# Altium PCB DCMT_DRIVER_40V10A.PcbDoc
Units mm, origin at the board's own origin, x right, y up, seen from the top; angles counter-clockwise.
Board outline 60 x 40 mm, 2 copper layers (Top Layer, Bottom Layer); 68 components, 48 nets, 224 pads, 178 vias.
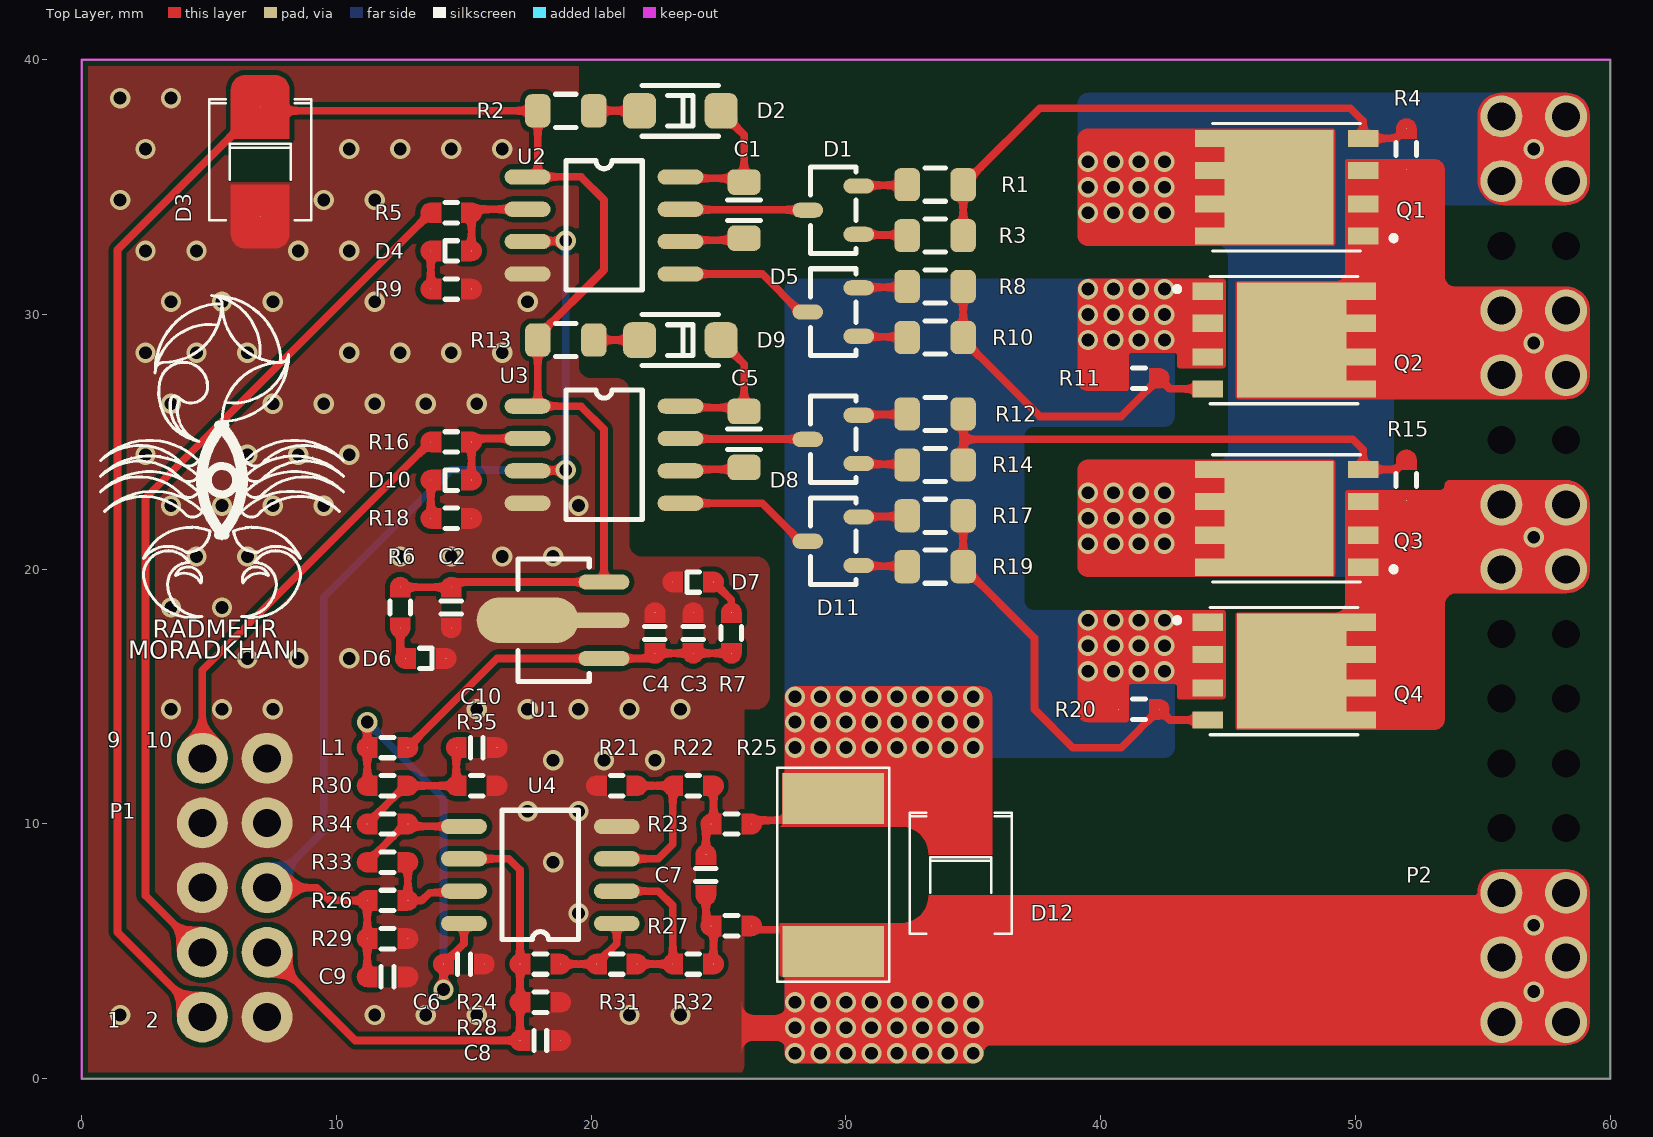
[diagram p0: Top Layer view]
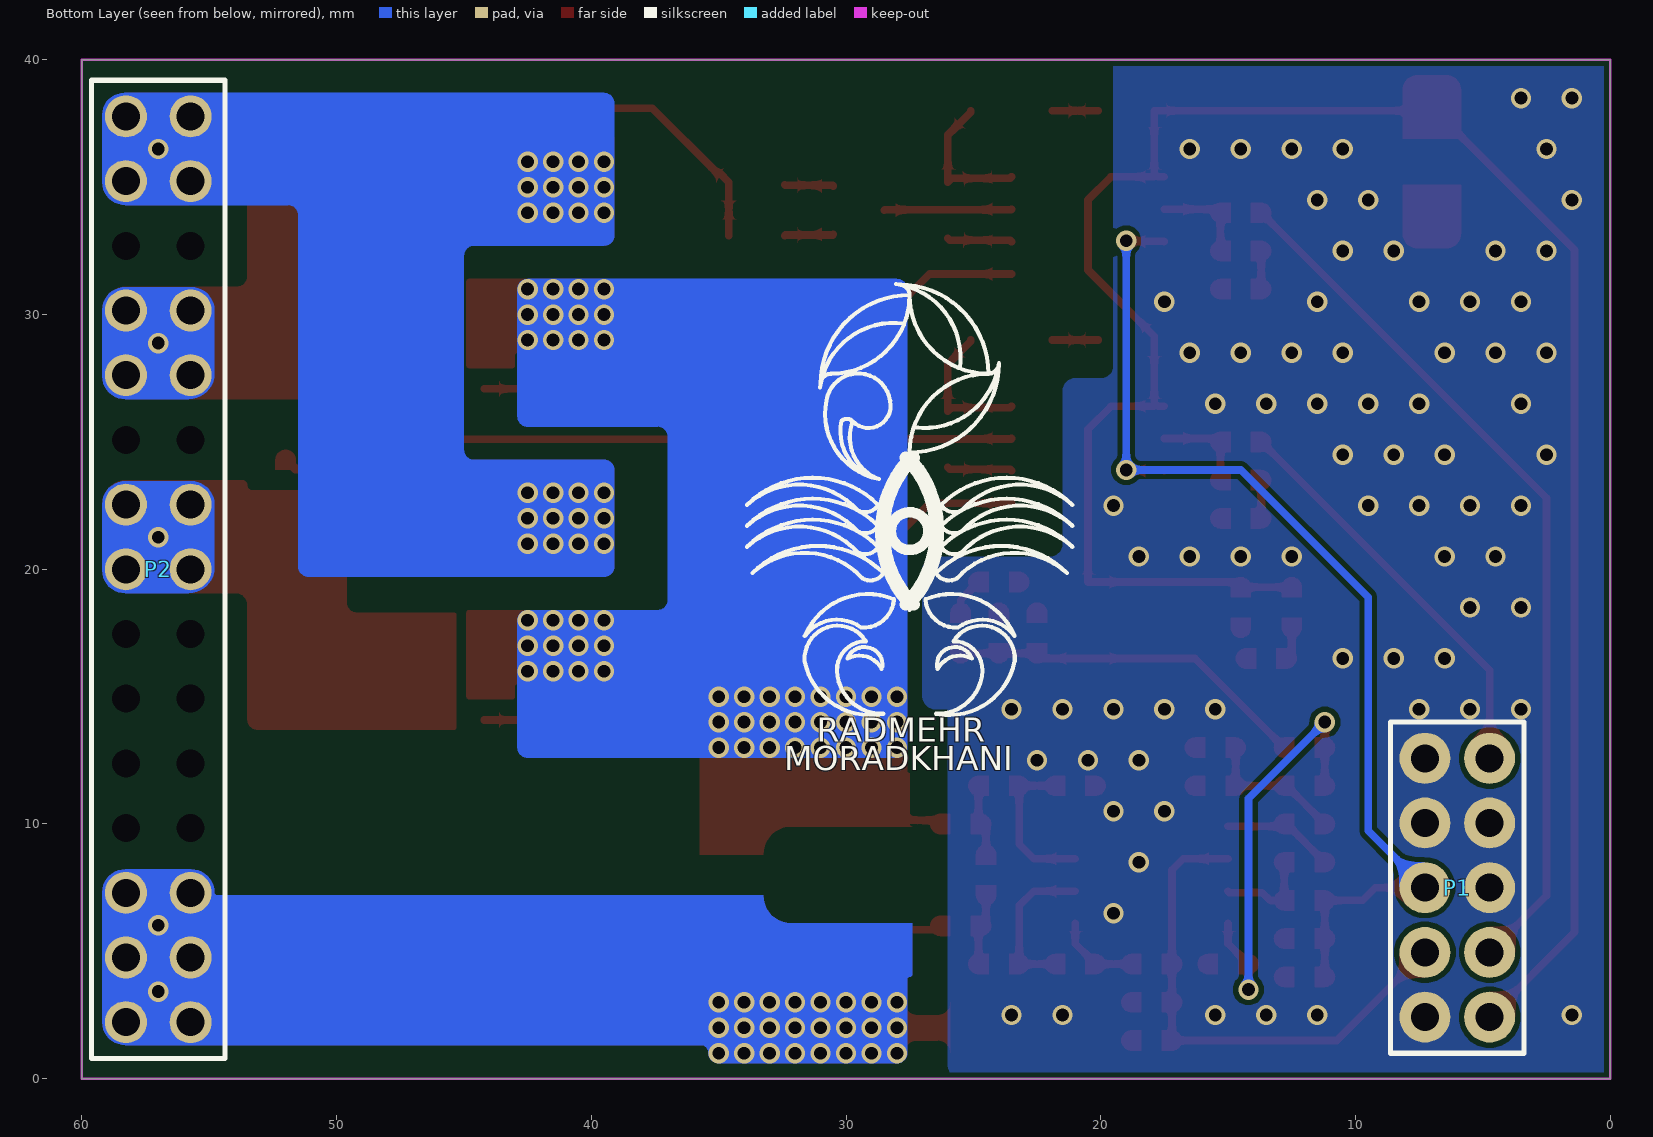
[diagram p1: Bottom Layer view, seen from below]
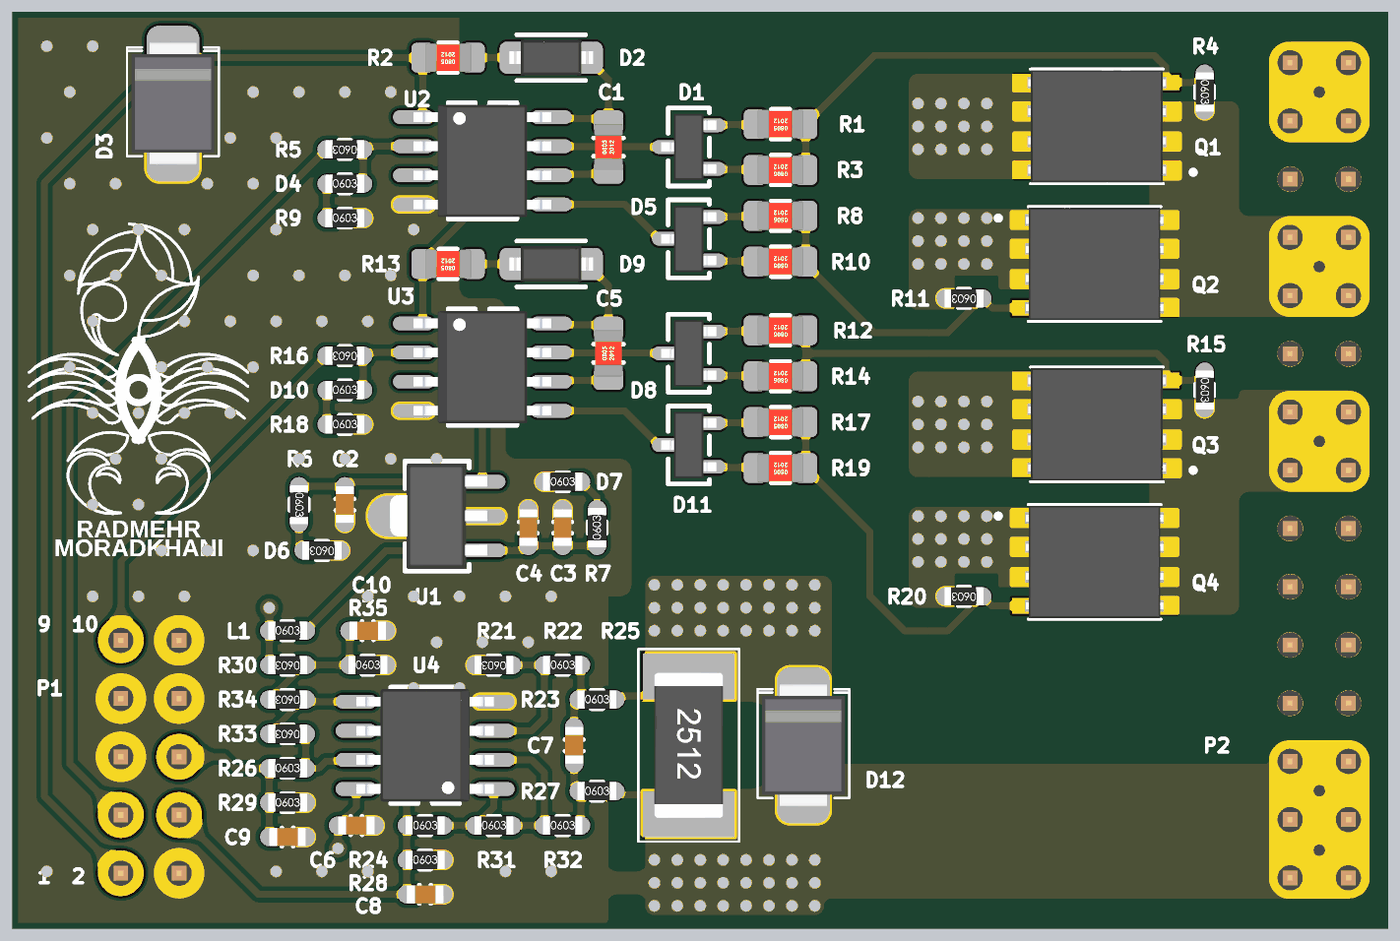
[diagram p2: 3D render of the assembled board from above, using the file's embedded part models]

## Layer stack, top to bottom
Top Solder: solder mask 0.0102, Solder Resist, Dk 3.5
Top Layer: signal copper 0.0356
Dielectric 1: dielectric 0.32, FR-4, Dk 4.8
Bottom Layer: signal copper 0.0356
Bottom Solder: solder mask 0.0102, Solder Resist, Dk 3.5

## Board outline
0,0 0,40 60,40 60,0

## Design rules (kind name [scope] priority, off if disabled: settings)
Clearance [All] p1: gap=0.2 ignorepadtopadclearanceinfootprint=FALSE
DiffPairsRouting [All] p1: maxlimit=0.3 minlimit=0.3 mostfreqgap=0.3 toplayer_minwidth=0.3 toplayer_maxwidth=0.3 toplayer_prefwidth=0.3 bottomlayer_minwidth=0.3 bottomlayer_maxwidth=0.3 bottomlayer_prefwidth=0.3 maxuncoupledlength=12.7
PlaneConnect [All] p1: planeconnectstyle=Relief reliefexpansion=0.5 reliefentries=4 reliefconductorwidth=0.3 reliefairgap=0.3
PolygonConnect [All] p1: connectstyle=Direct reliefconductorwidth=0.3 reliefentries=4 polygonreliefangle="90 Angle" airgapwidth=0.2
RoutingVias [All] p1: holewidth=0.5 width=0.8 viastyle="Through Hole" minholewidth=0.5 minwidth=0.8 maxholewidth=0.5 maxwidth=0.8
SolderMaskExpansion [All] p1: expansion=0.102 istentingtop=FALSE
Width [All] p1: maxlimit=1.2 minlimit=0.3 preferedwidth=0.6 minimp=50.000000 maximp=50.000000 favimp=50.000000
28 further rules are at their usual default settings.

## Components (designator, comment, footprint, x,y, rotation, side; value= is the part's Value field where it differs from the comment)
C1 "10u" "C 0805" 26,34.1 r270 top locked
C2 "10U" "C 0603" 14.5,18.5 r90 top locked
C3 "10U" "C 0603" 24,17.5 r270 top locked
C4 "1U" "C 0603" 22.5,17.5 r270 top locked
C5 "10u" "C 0805" 26,25.1 r270 top locked
C6 "100n" "C 0603" 15,4.5 r180 top locked
C7 "100n" "C 0603" 24.5,8 r90 top locked
C8 "100P" "C 0603" 18,1.5 r180 top locked
C9 "100P" "C 0603" 12,4 r180 top locked
C10 "100n" "C 0603" 15.5,13 r0 top locked
D1 "BAT54S" SOT-23_3_D 29.5,34.1 r180 top
D2 "US1M" "D SOD-123" 23.5,38 r0 top locked
D3 "+18V0" DIOD_SMB 7,36 r90 top
D4 "LED_SMD" "D 0603" 14.5,32.5 r180 top
D5 "BAT54S" SOT-23_3_D 29.5,30.1 r180 top
D6 "LED_SMD" "D 0603" 13.5,16.5 r0 top locked
D7 "LED_SMD" "D 0603" 24,19.5 r180 top locked
D8 "BAT54S" SOT-23_3_D 29.5,25.1 r180 top
D9 "1N4148" "D SOD-123" 23.5,29 r0 top locked
D10 "LED_SMD" "D 0603" 14.5,23.5 r180 top locked
D11 "BAT54S" SOT-23_3_D 29.5,21.1 r180 top
D12 "+5v0" DIOD_SMB 34.5,8 r90 top locked
L1 "FB" "L 0603" 12,13 r180 top locked
P1 "61301021121" 61301021121 6,7.5 r90 bottom
P2 "61303021121" 61303021121 57,20 r90 bottom
Q1 "CSD19533Q5A" Q5A 47,35 r180 top
Q2 "CSD19533Q5A" Q5A 47.5,29 r0 top
Q3 "CSD19533Q5A" Q5A 47,22 r180 top
Q4 "CSD19533Q5A" Q5A 47.5,16 r0 top
R1 "56R" "R 0805" 33.5,35.1 r0 top
R2 "10R" "R 0805" 19,38 r0 top locked
R3 "100R" "R 0805" 33.5,33.1 r0 top
R4 "10K" "R 0603" 52,36.5 r90 top
R5 "100R" "R 0603" 14.5,34 r0 top
R6 "4.7K" "R 0603" 12.5,18.5 r90 top locked
R7 "4.7K" "R 0603" 25.5,17.5 r270 top locked
R8 "56R" "R 0805" 33.5,31.1 r0 top
R9 "10K" "R 0603" 14.5,31 r180 top
R10 "100R" "R 0805" 33.5,29.1 r0 top
R11 "10K" "R 0603" 41.5,27.5 r0 top
R12 "56R" "R 0805" 33.5,26.1 r0 top
R13 "10R" "R 0805" 19,29 r0 top locked
R14 "100R" "R 0805" 33.5,24.1 r0 top
R15 "10K" "R 0603" 52,23.5 r90 top
R16 "100R" "R 0603" 14.5,25 r0 top locked
R17 "56R" "R 0805" 33.5,22.1 r0 top
R18 "10K" "R 0603" 14.5,22 r180 top locked
R19 "100R" "R 0805" 33.5,20.1 r0 top
R20 "10K" "R 0603" 41.5,14.5 r0 top
R21 "10K" "R 0603" 21,11.5 r0 top locked
R22 "1K" "R 0603" 24,11.5 r180 top locked
R23 "100R" "R 0603" 25.5,10 r180 top locked
R24 "100R" "R 0603" 18,4.5 r180 top locked
R25 "0R02" "R 2512" 29.5,8 r90 top locked
R26 "100R" "R 0603" 12,7 r180 top locked
R27 "100R" "R 0603" 25.5,6 r180 top locked
R28 "10K" "R 0603" 18,3 r180 top locked
R29 "10K" "R 0603" 12,5.5 r180 top locked
R30 "10k" "R 0603" 12,11.5 r0 top locked
R31 "10K" "R 0603" 21,4.5 r180 top locked
R32 "1K" "R 0603" 24,4.5 r180 top locked
R33 "9K" "R 0603" 12,8.5 r0 top locked
R34 "1K" "R 0603" 12,10 r0 top locked
R35 "10K" "R 0603" 15.5,11.5 r180 top locked
U1 "AP7370-XXY-13" SOT89-U 18.5,18 r90 top locked
U2 "IR2104" SOIC-8 20.5,33.5 r0 top locked
U3 "IR2104" SOIC-8 20.5,24.5 r0 top locked
U4 "TLV9062" SOIC-8 18,8 r180 top locked

## Footprints (in the part's own frame and the unit in brackets; to place one, negate y for a bottom-side part, rotate by r counter-clockwise, add the part's x,y. Pads: shape width x height; smd on the part's side, far side on the other; paste and mask are expansions set on the pad)
61301021121 [mm] "Pin Header, pitch 2.54 mm, THT, Vertical, dual row, 10p"
  round 2 hole 1.1: 1(-5.08,-1.27) 2(-5.08,1.27) 3(-2.54,-1.27) 4(-2.54,1.27) 5(0,-1.27) 6(0,1.27) 7(2.54,-1.27) 8(2.54,1.27) 9(5.08,-1.27) 10(5.08,1.27)
  silkscreen extent -6.5,-2.62 6.5,2.62, body extent -6.35,-2.54 6.35,2.54, height 8.59
61303021121 [mm] "Pin Header, pitch 2.54 mm, THT, Vertical, dual row, 30p"
  round 1.65 hole 1.1: 1(-17.78,-1.27) 2(-17.78,1.27) 3(-15.24,-1.27) 4(-15.24,1.27) 5(-12.7,-1.27) 6(-12.7,1.27) 15(0,-1.27) 16(0,1.27) 17(2.54,-1.27) 18(2.54,1.27) 21(7.62,-1.27) 22(7.62,1.27) 23(10.16,-1.27) 24(10.16,1.27) 27(15.24,-1.27) 28(15.24,1.27) 29(17.78,-1.27) 30(17.78,1.27)
  round 0 hole 1.1: 7(-10.16,-1.27) 8(-10.16,1.27) 9(-7.62,-1.27) 10(-7.62,1.27) 11(-5.08,-1.27) 12(-5.08,1.27) 13(-2.54,-1.27) 14(-2.54,1.27) 19(5.08,-1.27) 20(5.08,1.27) 25(12.7,-1.27) 26(12.7,1.27)
  silkscreen extent -19.2,-2.62 19.2,2.62, body extent -19.05,-2.54 19.05,2.54, height 8.59
"C 0603" [mil] "C?"
  round 1 smd mask+1.97: 1(-31.5,0) 2(31.5,0)
  Top Layer pour cut-out: -15.75,15.75 15.75,15.75 15.75,-15.75 -15.75,-15.75
  Top Layer region: -47.24,0 -46.04,6.03 -42.63,11.14 -37.52,14.55 -31.5,15.75 -31.5,15.75 -15.75,15.75 -15.75,-15.75 -31.5,-15.75 -37.52,-14.55 -42.63,-11.14 -46.04,-6.03 -47.24,0
  Top Layer region: 47.24,0 46.05,-6.03 42.63,-11.14 37.52,-14.55 31.5,-15.75 31.5,-15.75 15.75,-15.75 15.75,15.75 31.5,15.75 37.52,14.55 42.63,11.14 46.05,6.03 47.24,0
  silkscreen extent -10,-16 10,16, body extent -32,-16 31,16, height 35
"C 0805" [mm] "C?"
  rrect50% 1x1.3 smd: 1(-1.1,0) 2(1.1,0)
  Top Layer pour cut-out: -0.5,0.65 0.5,0.65 0.5,-0.65 -0.5,-0.65
  silkscreen extent -0.4,-0.65 0.4,0.65, body extent -1,-0.63 1,0.62, height 0.9
"D 0603" [mil] "D?"
  round 1 smd mask+1.97: 1(-31.5,0) 2(31.5,0)
  Top Layer pour cut-out: -15.75,15.75 15.75,15.75 15.75,-15.75 -15.75,-15.75
  Top Layer region: -47.24,0 -46.04,6.03 -42.63,11.14 -37.52,14.55 -31.5,15.75 -31.5,15.75 -15.75,15.75 -15.75,-15.75 -31.5,-15.75 -37.52,-14.55 -42.63,-11.14 -46.04,-6.03 -47.24,0
  Top Layer region: 47.24,0 46.05,-6.03 42.63,-11.14 37.52,-14.55 31.5,-15.75 31.5,-15.75 15.75,-15.75 15.75,15.75 31.5,15.75 37.52,14.55 42.63,11.14 46.05,6.03 47.24,0
  silkscreen extent -10,-16 10,16, body extent -33,-16 33,16, height 22
"D SOD-123" [mm] "D?"
  rrect50% 1.3x1.4 smd mask+0.1: 1(-1.6,0) 2(1.6,0)
  Top Layer pour cut-out: -1,0.9 1,0.9 1,-0.9 -1,-0.9
  silkscreen extent -1.5,-1 1.5,1, body extent -1.83,-0.77 1.83,0.77, height 1.54
DIOD_SMB [mil] "D?"
  round 1 smd: 1(-84.65,0) 2(84.65,0)
  Top Layer pour cut-out: -31.5,49.21 31.5,49.21 31.5,-49.21 -31.5,-49.21
  Top Layer region: 111.22,-45.28 35.43,-45.28 35.43,45.28 111.22,45.28 119.88,43.55 127.23,38.65 132.14,31.3 133.86,22.64 133.86,22.64 133.86,-22.64 132.14,-31.3 127.23,-38.65 119.88,-43.55 111.22,-45.28
  Top Layer region: -111.22,-45.28 -119.88,-43.55 -127.23,-38.65 -132.14,-31.3 -133.86,-22.64 -133.86,-22.64 -133.86,22.64 -132.14,31.3 -127.23,38.65 -119.88,43.55 -111.22,45.28 -111.22,45.28 -35.43,45.28 -35.43,-45.28
  silkscreen extent -91,-79 96,79, body extent -106,-71 106,71, height 91
"L 0603" [mil] "L?"
  round 1 smd mask+1.97: 1(-31.5,0) 2(31.5,0)
  Top Layer pour cut-out: -15.75,15.75 15.75,15.75 15.75,-15.75 -15.75,-15.75
  Top Layer region: 47.24,0 46.05,-6.03 42.63,-11.14 37.52,-14.55 31.5,-15.75 31.5,-15.75 15.75,-15.75 15.75,15.75 31.5,15.75 37.52,14.55 42.63,11.14 46.05,6.03 47.24,0
  Top Layer region: -47.24,0 -46.04,6.03 -42.63,11.14 -37.52,14.55 -31.5,15.75 -31.5,15.75 -15.75,15.75 -15.75,-15.75 -31.5,-15.75 -37.52,-14.55 -42.63,-11.14 -46.04,-6.03 -47.24,0
  silkscreen extent -10,-16 10,16, body extent -33,-16 33,16, height 22
Q5A [mm] "Q?"
  rect 1.2x0.675 smd paste-1: 1(-3.301,-1.918) 2(2.699,1.918) 2(2.699,0.66) 2(2.699,-0.66) 2(2.699,-1.917) 3(-3.301,-0.66) 3(-3.301,0.66) 3(-3.301,1.917)
  rect 4.295x4.51 smd paste-3: 2(0,0)
  silkscreen extent -4.55,-2.5 2.6,2.5, body extent -3.3,-2.45 2.7,2.45, height 1.11
"R 0603" [mil] "R?"
  round 1 smd mask+1.97: 1(-31.5,0) 2(31.5,0)
  Top Layer pour cut-out: -15.75,15.75 15.75,15.75 15.75,-15.75 -15.75,-15.75
  Top Layer region: 47.24,0 46.05,-6.03 42.63,-11.14 37.52,-14.55 31.5,-15.75 31.5,-15.75 15.75,-15.75 15.75,15.75 31.5,15.75 37.52,14.55 42.63,11.14 46.05,6.03 47.24,0
  Top Layer region: -47.24,0 -46.04,6.03 -42.63,11.14 -37.52,14.55 -31.5,15.75 -31.5,15.75 -15.75,15.75 -15.75,-15.75 -31.5,-15.75 -37.52,-14.55 -42.63,-11.14 -46.04,-6.03 -47.24,0
  silkscreen extent -10,-16 10,16, body extent -33,-16 33,16, height 22
"R 0805" [mm] "R?"
  rrect50% 1x1.3 smd: 1(-1.1,0) 2(1.1,0)
  Top Layer pour cut-out: -0.5,0.65 0.5,0.65 0.5,-0.65 -0.5,-0.65
  silkscreen extent -0.4,-0.65 0.4,0.65, body extent -1,-0.63 1,0.62, height 0.9
"R 2512" [mm] "R?"
  rect 2x4 smd: 1(-3,0) 2(3,0)
  Top Layer pour cut-out: -1.9,2.1 1.9,2.1 1.9,-2.1 -1.9,-2.1
  silkscreen extent -4.2,-2.2 4.2,2.2, body extent -3.17,-1.5 3.17,1.5, height 1.6
SOIC-8 [mm] "U?"
  oval 1.8x0.6 smd: 1(-3,1.905) 2(-3,0.635) 3(-3,-0.635) 4(-3,-1.905) 5(3,-1.905) 6(3,-0.635) 7(3,0.635) 8(3,1.905)
  silkscreen extent -1.5,-2.54 1.5,2.54, body extent -3,-2.45 3,2.45, height 1.75
SOT89-U [mm] "U?"
  oval 0.6x2 smd: 1(-1.5,-2) 3(1.5,-2)
  oval 0.6x4 smd: 2(0,-1)
  oval 1.8x4 smd mask+0.1: 2(0,1)
  silkscreen extent -2.4,-1.42 2.4,1.38, body extent -2.3,-2.22 2.3,2.03, height 1.59
SOT-23_3_D [mm] "D?"
  oval 1.2x0.6 smd: 1(-1,0.95) 2(-1,-0.95) 3(1,0)
  silkscreen extent -0.9,-1.7 0.9,1.7, body extent -1.2,-1.45 1.2,1.45, height 1.16

## Part data
C1 C2 C3 C4 C5 C6 C7 C8 C9 C10: library part CAP_SMD, "CAP_SMD"
D2 D9: library part DIOD_SMD, "DIOD_SMD"
D3 D12: library part DIOD_SMD_TVS_UI, "TVS_UI"
L1: library part Inductor, "Inductor"
P1: "WR-PHD Pin Header, THT, pitch 2.54mm, Dual Row, Vertical, 10p", Contact Resistance=20mOhm, Manufacturer="Wurth Elektronik", Operating Temperature="-40 to +105degC", Rated Current=3A, Withstanding Voltage=500VAC, Working Voltage=250VAC, ComponentLink1Description=Manufacturer, ComponentLink1URL=http://www.we-online.de, ComponentLink2Description=Datasheet, ComponentLink2URL=https://www.we-online.com/catalog/datasheet/61301021121.pdf, Gender="Pin Header", Manufacturer Part Number=61301021121, Mounting Technology=THT, Orientation=Vertical, Packaging=Bag, Pin Number=10, Pitch=2.54mm, Row Number=Dual
P2: "WR-PHD Pin Header, THT, pitch 2.54mm, Dual Row, Vertical, 30p", Contact Resistance=20mOhm, Manufacturer="Wurth Elektronik", Operating Temperature="-40 to +105degC", Rated Current=3A, Withstanding Voltage=500VAC, Working Voltage=250VAC, ComponentLink1Description=Manufacturer, ComponentLink1URL=http://www.we-online.de, ComponentLink2Description=Datasheet, ComponentLink2URL=https://www.we-online.com/catalog/datasheet/61303021121.pdf, Gender="Pin Header", Manufacturer Part Number=61303021121, Mounting Technology=THT, Orientation=Vertical, Packaging=Bag, Pin Number=30, Pitch=2.54mm, Row Number=Dual
R1 R2 R3 R4 R5 R6 R7 R8 R9 R10 R11 R12 R13 R14 R15 R16 R17 R18 R19 R20 R21 R22 R23 R24 R25 R26 R27 R28 R29 R30 R31 R32 R33 R34 R35: library part RES_SMD, "RES_SMD"

## Via types
v1: diameter 0.8, hole 0.5, Top Layer to Bottom Layer, tented both sides, 178 vias

## Nets (pads, with @x,y where several pads share a name; then routed paths per layer and width w, separated by ;. In a path a pad name is that pad's centre, name@x,y a point inside that pad or via, vN(x,y) a via of type N, cw(c..) or ccw(c..) an arc to the next point about the centre after c; other vN are vias at no path point)
+3V3: C3.2 C4.2 L1.1 R7.2 U1.1 | length 14.2
  Top Layer w0.3: L1.1 16.3,16.5 U1.1 22.3,16.5 C4.2 C3.2 R7.2
+3V3A: C6.2 L1.2 R30.1 U4.8 | length 17.2
  Top Layer w0.3: R30.1 v1(11.2,14) ; v1(14.2,3.5) C6.2 15,5.3 U4.8
  Bottom Layer w0.3: v1(11.2,14) 14.2,11 v1(14.2,3.5)
+15V0: C2.2 D3.2 P1.1 R2.1 R6.2 R13.1 U1.3 U2.1 U3.1 | length 82.8
  Top Layer w0.3: P1.1 1.4,5.75 1.4,32.55 D3.2 7.15,38 R2.1 17.9,35.544 17.761,35.405 U2.1 ; R6.2 C2.2 14.7,19.5 U1.3 20.5,25.5 19.595,26.405 U3.1@17.9,26.405 ; U3.1 17.761,26.405 17.9,26.544 R13.1 17.9,29.15 20.5,31.75 20.5,34.5 19.595,35.405 U2.1@17.9,35.405
+40V0: P2.27 P2.28 P2.29 P2.30 Q1.2 Q3.2
  other v1: 39.5,21 40.5,21 41.5,21 42.5,21 39.5,22 40.5,22 41.5,22 42.5,22 39.5,23 40.5,23 41.5,23 42.5,23 39.5,34 40.5,34 41.5,34 42.5,34 39.5,35 40.5,35 41.5,35 42.5,35 39.5,36 40.5,36 41.5,36 42.5,36 57,36.5
GND: C2.1 C3.1 C4.1 C6.1 C8.1 C9.1 C10.2 D3.1 D6.2 D7.2 D12.1 P1.2 P1.5 P1.7 P1.8 P1.10 P2.1 P2.2 P2.3 P2.4 P2.5 P2.6 R9.1 R18.1 R21.1 R25.1 R27.1 R28.1 R29.1 R35.1 U1.2 U2.4 U3.4 U4.4 | length 3.6
  Top Layer w0.3: R27.1 26.45,5.85 28.65,5.85 R25.1
  other v1: 28,1 29,1 30,1 31,1 32,1 33,1 34,1 35,1 28,2 29,2 30,2 31,2 32,2 33,2 34,2 35,2 1.5,2.5 11.5,2.5 13.5,2.5 15.5,2.5 21.5,2.5 23.5,2.5 28,3 29,3 30,3 31,3 32,3 33,3 34,3 35,3 57,3.42 57,6.02 19.5,6.5 18.5,8.5 17.5,10.5 19.5,10.5 18.5,12.5 20.5,12.5 22.5,12.5 3.5,14.5 5.5,14.5 7.5,14.5 15.5,14.5 17.5,14.5 19.5,14.5 21.5,14.5 23.5,14.5 6.5,16.5 8.5,16.5 10.5,16.5 3.5,18.5 5.5,18.5 4.5,20.5 6.5,20.5 12.5,20.5 14.5,20.5 16.5,20.5 18.5,20.5 3.5,22.5 5.5,22.5 7.5,22.5 9.5,22.5 19.5,22.5 2.5,24.5 6.5,24.5 8.5,24.5 10.5,24.5 3.5,26.5 7.5,26.5 9.5,26.5 11.5,26.5 13.5,26.5 15.5,26.5 2.5,28.5 4.5,28.5 6.5,28.5 10.5,28.5 12.5,28.5 14.5,28.5 16.5,28.5 3.5,30.5 5.5,30.5 7.5,30.5 11.5,30.5 17.5,30.5 2.5,32.5 4.5,32.5 8.5,32.5 10.5,32.5 1.5,34.5 9.5,34.5 11.5,34.5 2.5,36.5 10.5,36.5 12.5,36.5 14.5,36.5 16.5,36.5 1.5,38.5 3.5,38.5
HB_OUT_A: P2.21 P2.22 P2.23 P2.24 Q1.3 Q2.2 R4.1
  other v1: 57,28.88
HB_OUT_B: P2.15 P2.16 P2.17 P2.18 Q3.3 Q4.2 R15.1
  other v1: 57,21.26
HB_S: D12.2 Q2.3 Q4.3 R11.1 R20.1 R23.1 R25.2 | length 3.6
  Top Layer w0.3: R23.1 26.45,10.15 28.65,10.15 R25.2
  other v1: 28,13 29,13 30,13 31,13 32,13 33,13 34,13 35,13 28,14 29,14 30,14 31,14 32,14 33,14 34,14 35,14 28,15 29,15 30,15 31,15 32,15 33,15 34,15 35,15 39.5,16 40.5,16 41.5,16 42.5,16 39.5,17 40.5,17 41.5,17 42.5,17 39.5,18 40.5,18 41.5,18 42.5,18 39.5,29 40.5,29 41.5,29 42.5,29 39.5,30 40.5,30 41.5,30 42.5,30 39.5,31 40.5,31 41.5,31 42.5,31
I\_\S\D\: C9.2 P1.6 R26.2 R29.2 U2.3 U3.3 | length 43.1
  Top Layer w0.3: P1.6 9.215,7.5 9.715,7 R26.2 R29.2 C9.2 ; U3.3 17.518,23.882 18.982,23.882 v1(19,23.9) ; U2.3 17.518,32.882 18.982,32.882 v1(19,32.9)
  Bottom Layer w0.3: P1.6 9.5,9.73 9.5,18.9 14.5,23.9 v1(19,23.9) v1(19,32.9)
I_AMPT: C8.2 P1.4 R24.2 R28.2 U4.6 | length 20.4
  Top Layer w0.3: P1.4 10.73,1.5 C8.2 R28.2 R24.2 17.2,8.2 16.765,8.635 U4.6
NetC1_1: C1.1 D2.2 U2.8 | length 5.8
  Top Layer w0.3: U2.8 23.557,35.348 25.852,35.348 C1.1 26,37.05 25.1,37.95 D2.2
NetC1_2: C1.2 U2.6 | length 2.6
  Top Layer w0.3: U2.6 23.557,32.922 25.922,32.922 C1.2
NetC5_1: C5.1 D9.2 U3.8 | length 5.8
  Top Layer w0.3: U3.8 23.557,26.348 25.852,26.348 C5.1 26,28.05 25.1,28.95 D9.2
NetC5_2: C5.2 U3.6 | length 2.6
  Top Layer w0.3: U3.6 23.557,23.922 25.922,23.922 C5.2
NetC7_1: C7.1 R27.2 R32.1 | length 2.8
  Top Layer w0.3: C7.1 24.5,6.2 R27.2 24.8,5.9 R32.1
NetC7_2: C7.2 R22.1 R23.2 | length 2.8
  Top Layer w0.3: C7.2 24.5,9.8 R23.2 24.8,10.1 R22.1
NetC10_1: C10.1 R30.2 R34.1 R35.2 | length 5.6
  Top Layer w0.3: R34.1 12.7,11.5 R30.2 R35.2 C10.1
NetD1_1: D1.1 R3.1 | length 1.9
  Top Layer w0.3: D1.1 30.525,33.125 32.375,33.125 R3.1
NetD1_2: D1.2 R1.1 | length 1.9
  Top Layer w0.3: D1.2 30.525,35.075 32.375,35.075 R1.1
NetD1_3: D1.3 U2.7 | length 5
  Top Layer w0.3: U2.7 23.517,34.117 28.483,34.117 D1.3
NetD2_1: D2.1 R2.2 | length 1.8
  Top Layer w0.3: R2.2 D2.1
NetD4_1: D4.1 R5.2 U2.2 | length 3.8
  Top Layer w0.3: D4.1 R5.2 15.435,34.135 U2.2
NetD4_2: D4.2 R9.2 | length 1.5
  Top Layer w0.3: R9.2 D4.2
NetD5_1: D5.1 R10.1 | length 1.9
  Top Layer w0.3: D5.1 30.525,29.125 32.375,29.125 R10.1
NetD5_2: D5.2 R8.1 | length 1.9
  Top Layer w0.3: D5.2 30.525,31.075 32.375,31.075 R8.1
NetD5_3: D5.3 U2.5 | length 5.6
  Top Layer w0.3: U2.5 26.705,31.595 28.2,30.1 D5.3
NetD6_1: D6.1 R6.1 | length 1.3
  Top Layer w0.3: R6.1 12.5,16.7 D6.1
NetD7_1: D7.1 R7.1 | length 1.5
  Top Layer w0.3: D7.1 25.5,18.8 R7.1
NetD8_1: D8.1 R14.1 | length 1.9
  Top Layer w0.3: D8.1 30.525,24.125 32.375,24.125 R14.1
NetD8_2: D8.2 R12.1 | length 1.9
  Top Layer w0.3: D8.2 30.525,26.075 32.375,26.075 R12.1
NetD8_3: D8.3 U3.7 | length 5
  Top Layer w0.3: U3.7 23.517,25.117 28.483,25.117 D8.3
NetD9_1: D9.1 R13.2 | length 1.8
  Top Layer w0.3: R13.2 D9.1
NetD10_1: D10.1 R16.2 U3.2 | length 3.8
  Top Layer w0.3: D10.1 R16.2 15.435,25.135 U3.2
NetD10_2: D10.2 R18.2 | length 1.5
  Top Layer w0.3: R18.2 D10.2
NetD11_1: D11.1 R19.1 | length 1.9
  Top Layer w0.3: D11.1 30.525,20.125 32.375,20.125 R19.1
NetD11_2: D11.2 R17.1 | length 1.9
  Top Layer w0.3: D11.2 30.525,22.075 32.375,22.075 R17.1
NetD11_3: D11.3 U3.5 | length 5.6
  Top Layer w0.3: U3.5 26.705,22.595 28.2,21.1 D11.3
NetQ1_1: Q1.1 R1.2 R3.2 R4.2 | length 21.7
  Top Layer w0.3: R3.2 R1.2 34.6,35.196 34.942,35.538 35.038,35.538 37.6,38.1 49.8,38.1 50.301,37.599 Q1.1 51.617,36.918 R4.2
NetQ2_1: Q2.1 R8.2 R10.2 R11.2 | length 13.7
  Top Layer w0.3: R8.2 34.6,29.004 37.604,26 40.8,26 R11.2 42.718,27.083 Q2.1
NetQ3_1: Q3.1 R12.2 R14.2 R15.2 | length 20.7
  Top Layer w0.3: R14.2@34.6,23.904 R14.2 34.6,25.1 ; R12.2 34.6,25.1 ; R15.2 51.617,23.917 Q3.1 50.301,24.699 49.9,25.1 34.6,25.1
NetQ4_1: Q4.1 R17.2 R19.2 R20.2 | length 17
  Top Layer w0.3: R17.2 R19.2 37.4,17.3 37.4,14.5 38.9,13 40.8,13 R20.2 42.718,14.082 Q4.1
NetR21_2: R21.2 R22.2 U4.3 | length 6.1
  Top Layer w0.3: U4.3 22.635,8.635 23.2,9.2 R22.2 R21.2
NetR24_1: R24.1 R31.2 U4.1 | length 3.3
  Top Layer w0.3: R24.1 R31.2 21,5.3 U4.1
NetR26_1: R26.1 R33.2 U4.7 | length 3.9
  Top Layer w0.3: R33.2 R26.1 13.354,7 13.661,7.308 14.943,7.308 U4.7
NetR31_1: R31.1 R32.2 U4.2 | length 6.1
  Top Layer w0.3: U4.2 22.635,7.365 23.2,6.8 R32.2 R31.1
NetR33_1: R33.1 R34.2 U4.5 | length 4.5
  Top Layer w0.3: R33.1 12.7,10 R34.2 12.895,9.905 U4.5
PWM_A: P1.3 R5.1 | length 34.6
  Top Layer w0.3: P1.3 2.5,7.19 2.5,22.8 R5.1
PWM_B: P1.9 R16.1 | length 16.1
  Top Layer w0.3: P1.9 4.73,16.03 R16.1
pads on no net: P2.7 P2.8 P2.9 P2.10 P2.11 P2.12 P2.13 P2.14 P2.19 P2.20 P2.25 P2.26

## Polygon pours and split planes (outlines as drawn)
GND on Bottom Layer "GND_L02_P001" (solid, remove dead copper, pour order 1): 0,40 60,40 60,0 0,0
GND on Top Layer "GND_L01_P002" (solid, remove dead copper, pour order 2): 0,40 60,40 60,0 0,0

## Keep-outs
Keep-Out Layer:
  the board outline again, w0.1

## Other copper
Top Layer:
  region net GND: 27.7,3 cw(c27.2,3) 27.2,2.5 26.4,2.5 cw(c26.4,3) 25.9,3 25.9,1 cw(c26.4,1) 26.4,1.5 27.2,1.5 cw(c27.2,1) 27.7,1
  pour cut-out: 60,40 60,0 25.5,0 ccw(c25.5,0.5) 26,0.5 26,14.5 26.5,14.5 ccw(c26.5,15) 27,15 27,20 ccw(c26.5,20) 26.5,20.5 22,20.5 cw(c22,21) 21.5,21 21.5,27 ccw(c21,27) 21,27.5 20,27.5 cw(c20,28) 19.5,28 19.5,40
  region net HB_OUT_A: 49.6,36 cw(c49.7,36) 49.7,36.1 53.1,36.1 cw(c53.1,35.7) 53.5,35.7 53.5,31.5 ccw(c53.9,31.5) 53.9,31.1 58.28,31.1 cw(c58.28,30.18) 59.2,30.18 59.2,27.58 cw(c58.3,27.58) 58.3,26.68 45.42,26.68 cw(c45.42,26.8) 45.3,26.8 45.3,31.2 cw(c45.4,31.2) 45.4,31.3 49.2,31.3 ccw(c49.2,31.7) 49.6,31.7
  region net HB_OUT_B: 49.6,23 cw(c49.7,23) 49.7,23.1 53.3,23.1 ccw(c53.3,23.3) 53.5,23.3 cw(c53.7,23.3) 53.7,23.5 58.26,23.5 cw(c58.26,22.56) 59.2,22.56 59.2,19.96 cw(c58.3,19.96) 58.3,19.06 53.96,19.06 ccw(c53.96,18.6) 53.5,18.6 53.5,14.1 cw(c53.1,14.1) 53.1,13.7 45.4,13.7 cw(c45.4,13.8) 45.3,13.8 45.3,18.2 cw(c45.4,18.2) 45.4,18.3 49.2,18.3 ccw(c49.2,18.7) 49.6,18.7
  region net +40V0: 55.7,38.7 58.3,38.7 cw(c58.3,37.8) 59.2,37.8 59.2,35.2 cw(c58.3,35.2) 58.3,34.3 55.8,34.3 cw(c55.8,35.3) 54.8,35.3 54.8,37.8 cw(c55.7,37.8)
  region net HB_OUT_B: 55.7,23.46 58.3,23.46 cw(c58.3,22.56) 59.2,22.56 59.2,19.96 cw(c58.3,19.96) 58.3,19.06 55.8,19.06 cw(c55.8,20.06) 54.8,20.06 54.8,22.56 cw(c55.7,22.56)
  region net HB_OUT_A: 55.7,31.08 58.3,31.08 cw(c58.3,30.18) 59.2,30.18 59.2,27.58 cw(c58.3,27.58) 58.3,26.68 55.8,26.68 cw(c55.8,27.68) 54.8,27.68 54.8,30.18 cw(c55.7,30.18)
  region net GND: 54.68,7.2 ccw(c54.68,7.32) 54.8,7.32 cw(c55.7,7.32) 55.7,8.22 58.3,8.22 cw(c58.3,7.32) 59.2,7.32 59.2,2.22 cw(c58.3,2.22) 58.3,1.32 35.72,1.32 ccw(c35.72,1) 35.4,1 cw(c35,1) 35,0.6 28,0.6 cw(c28,1) 27.6,1 27.6,3.9 ccw(c27.5,3.9) 27.5,4 cw(c27.5,4.1) 27.4,4.1 27.4,6.1 32.15,6.1 ccw(c32.15,7.2) 33.25,7.2
  region net HB_S: 39.1,31 cw(c39.5,31) 39.5,31.4 44.8,31.4 cw(c44.8,31.3) 44.9,31.3 44.9,28 cw(c44.8,28) 44.8,27.9 43.1,27.9 cw(c43.1,28) 43,28 43,28.4 ccw(c42.9,28.4) 42.9,28.5 41.2,28.5 ccw(c41.2,28.4) 41.1,28.4 41.1,27.1 cw(c41,27.1) 41,27 39.5,27 cw(c39.5,27.4) 39.1,27.4
  region net HB_S: 39.1,18 cw(c39.5,18) 39.5,18.4 44.8,18.4 cw(c44.8,18.3) 44.9,18.3 44.9,15 cw(c44.8,15) 44.8,14.9 43.1,14.9 cw(c43.1,15) 43,15 43,15.4 ccw(c42.9,15.4) 42.9,15.5 41.2,15.5 ccw(c41.2,15.4) 41.1,15.4 41.1,14.1 cw(c41,14.1) 41,14 39.5,14 cw(c39.5,14.4) 39.1,14.4
  region net +40V0: 39.1,23.9 cw(c39.5,23.9) 39.5,24.3 49.1,24.3 cw(c49.1,24.2) 49.2,24.2 49.2,19.8 cw(c49.1,19.8) 49.1,19.7 39.5,19.7 cw(c39.5,20.1) 39.1,20.1
  region net +40V0: 39.1,36.9 cw(c39.5,36.9) 39.5,37.3 49.1,37.3 cw(c49.1,37.2) 49.2,37.2 49.2,32.8 cw(c49.1,32.8) 49.1,32.7 39.5,32.7 cw(c39.5,33.1) 39.1,33.1
  region net HB_S: 35.75,8.8 35.75,14.95 ccw(c35.3,14.95) 35.3,15.4 28,15.4 ccw(c28,15) 27.6,15 27.6,12.1 cw(c27.5,12.1) 27.5,12 27.5,10 cw(c27.4,10) 27.4,9.9 32.15,9.9 cw(c32.15,8.8) 33.25,8.8
  region net GND: 55.7,8.22 58.3,8.22 cw(c58.3,7.32) 59.2,7.32 59.2,2.22 cw(c58.3,2.22) 58.3,1.32 55.7,1.32 cw(c55.7,2.22) 54.8,2.22 54.8,7.32 cw(c55.7,7.32)
Bottom Layer:
  pour cut-out: 60,40 60,0 25.5,0 ccw(c25.5,0.5) 26,0.5 26,14.5 26.5,14.5 ccw(c26.5,15) 27,15 27,20 ccw(c26.5,20) 26.5,20.5 22,20.5 cw(c22,21) 21.5,21 21.5,27 ccw(c21,27) 21,27.5 20,27.5 cw(c20,28) 19.5,28 19.5,40
  region net HB_S: 42.5,12.6 ccw(c42.5,13) 42.9,13 42.9,18 ccw(c42.5,18) 42.5,18.4 37.4,18.4 cw(c37.4,18.8) 37,18.8 37,25.2 cw(c37.4,25.2) 37.4,25.6 42.5,25.6 ccw(c42.5,26) 42.9,26 42.9,31 ccw(c42.5,31) 42.5,31.4 28,31.4 ccw(c28,31) 27.6,31 27.6,13 ccw(c28,13) 28,12.6
  region net +40V0: 39.5,38.7 ccw(c39.5,38.3) 39.1,38.3 39.1,33.1 ccw(c39.5,33.1) 39.5,32.7 44.6,32.7 cw(c44.6,32.3) 45,32.3 45,24.7 cw(c44.6,24.7) 44.6,24.3 39.5,24.3 ccw(c39.5,23.9) 39.1,23.9 39.1,20.1 ccw(c39.5,20.1) 39.5,19.7 51.1,19.7 ccw(c51.1,20.1) 51.5,20.1 51.5,33.9 cw(c51.9,33.9) 51.9,34.3 58.3,34.3 ccw(c58.3,35.2) 59.2,35.2 59.2,37.844 ccw(c58.344,37.844) 58.344,38.7
  region net HB_OUT_B: 55.7,23.46 58.3,23.46 cw(c58.3,22.56) 59.2,22.56 59.2,19.96 cw(c58.3,19.96) 58.3,19.06 55.8,19.06 cw(c55.8,20.06) 54.8,20.06 54.8,22.56 cw(c55.7,22.56)
  region net HB_OUT_A: 55.7,31.08 58.3,31.08 cw(c58.3,30.18) 59.2,30.18 59.2,27.58 cw(c58.3,27.58) 58.3,26.68 55.8,26.68 cw(c55.8,27.68) 54.8,27.68 54.8,30.18 cw(c55.7,30.18)
  region net +40V0: 55.7,38.7 58.3,38.7 cw(c58.3,37.8) 59.2,37.8 59.2,35.2 cw(c58.3,35.2) 58.3,34.3 55.8,34.3 cw(c55.8,35.3) 54.8,35.3 54.8,37.8 cw(c55.7,37.8)
  region net GND: 54.68,7.2 ccw(c54.68,7.32) 54.8,7.32 cw(c55.7,7.32) 55.7,8.22 58.3,8.22 cw(c58.3,7.32) 59.2,7.32 59.2,2.22 cw(c58.3,2.22) 58.3,1.32 35.72,1.32 ccw(c35.72,1) 35.4,1 cw(c35,1) 35,0.6 28,0.6 cw(c28,1) 27.6,1 27.6,3.9 ccw(c27.5,3.9) 27.5,4 cw(c27.5,4.1) 27.4,4.1 27.4,6.1 32.15,6.1 ccw(c32.15,7.2) 33.25,7.2
  region net GND: 55.7,8.22 58.3,8.22 cw(c58.3,7.32) 59.2,7.32 59.2,2.22 cw(c58.3,2.22) 58.3,1.32 55.7,1.32 cw(c55.7,2.22) 54.8,2.22 54.8,7.32 cw(c55.7,7.32)

## Silkscreen, mask and mechanical layers (free items; w line width, h text height)
Top Overlay:
  circle w0.308: c5.5,23.5 r0.554
  lines w0.121: 2.869,27.715 cw(c5.039,27.423) 5.331,29.593 ; 3.826,26.718 ccw(c5.057,26.256) 4.595,25.025 ; 5.098,30.749 cw(c4.805,28.579) 6.976,28.286 ; 5.654,26.548 ccw(c5.946,28.718) 8.117,28.425 ; 4.595,25.025 cw(c4.901,26.427) 3.499,26.732 cw(c3.657,26.562) 3.828,26.72 ccw(c4.291,27.175) 4.94,27.186 ccw(c3.991,27.177) 3.056,27.334 ccw(c4.98,26.949) 4.595,25.025 ; 5.5,25.809 ccw(c5.5,28.425) 8.117,28.425 ; 5.5,25.809 cw(c7.809,25.809) 7.809,28.117 ; 5.5,25.809 cw(c3.191,23.5) 5.5,21.191 cw(c7.809,23.5) 5.5,25.809 ; 5.5,30.426 ccw(c5.5,27.81) 2.883,27.81 cw(c3.191,27.81) 3.191,28.117 ccw(c3.191,30.426) 5.5,30.426 ; 5.5,30.426 ccw(c5.192,30.426) 5.192,30.734 cw(c5.192,28.117) 7.809,28.117 ; 5.5,30.426 ccw(c7.809,30.426) 7.809,28.117 ; 7.809,28.117 ccw(c7.809,28.425) 8.117,28.425 ; 0.729,23.038 cw(c2.653,21.114) 4.577,23.038 cw(c4.192,23.269) 3.961,22.884 ccw(c2.268,21.345) 0.729,23.038 ; 0.729,23.654 cw(c2.653,21.73) 4.577,23.654 cw(c4.192,23.885) 3.961,23.5 ccw(c2.268,21.961) 0.729,23.654 ; 0.729,24.27 cw(c2.653,22.346) 4.577,24.27 cw(c4.192,24.5) 3.961,24.116 ccw(c2.268,22.577) 0.729,24.27 ; 0.883,22.269 cw(c2.806,20.345) 4.73,22.269 cw(c4.346,22.5) 4.115,22.115 ccw(c2.422,20.576) 0.883,22.269 ; 2.417,19.684 cw(c3.388,19.753) 4.214,20.269 ccw(c4.218,19.414) 3.364,19.41 ccw(c4.678,19.455) 4.723,18.14 cw(c4.342,20.065) 2.417,19.684 ; 2.422,20.422 cw(c4.269,19.652) 5.038,21.499 cw(c4.146,21.561) 4.084,20.668 ccw(c3.376,19.714) 2.422,20.422 ; 3.679,19.76 cw(c4.163,19.581) 4.342,20.065 cw(c4.205,19.592) 4.678,19.455 ccw(c4.026,19.108) 3.679,19.76 ; 5.962,21.499 ccw(c6.854,21.561) 6.916,20.668 cw(c7.624,19.714) 8.578,20.422 ccw(c6.731,19.652) 5.962,21.499 ; 6.27,22.269 ccw(c6.654,22.5) 6.885,22.115 cw(c8.578,20.576) 10.117,22.269 ccw(c8.194,20.345) 6.27,22.269 ; 6.277,18.14 ccw(c6.658,20.065) 8.583,19.684 ccw(c7.612,19.753) 6.786,20.269 cw(c6.782,19.414) 7.636,19.41 cw(c6.322,19.455) 6.277,18.14 ; 6.322,19.455 cw(c6.795,19.592) 6.658,20.065 cw(c6.837,19.581) 7.321,19.76 ccw(c6.974,19.108) 6.322,19.455 ; 6.423,23.038 ccw(c6.808,23.269) 7.039,22.884 cw(c8.732,21.345) 10.271,23.038 ccw(c8.347,21.114) 6.423,23.038 ; 6.423,23.654 ccw(c6.808,23.885) 7.039,23.5 cw(c8.732,21.961) 10.271,23.654 ccw(c8.347,21.73) 6.423,23.654 ; 6.423,24.27 ccw(c6.808,24.5) 7.039,24.116 cw(c8.732,22.577) 10.271,24.27 ccw(c8.347,22.346) 6.423,24.27
  lines w0.364: 5.377,21.345 ccw(c3.222,23.5) 5.377,25.655 ; 5.623,21.345 cw(c7.778,23.5) 5.623,25.655
  text "RADMEHR" at 2.781,17.077 h1.21
  text "MORADKHANI" at 1.823,16.243 h1.21
Bottom Overlay:
  circle w0.412: c27.5,21.5 r0.741
  lines w0.162: 25.526,27.903 cw(c28.429,28.295) 28.038,31.198 ; 27.294,25.577 cw(c26.903,28.481) 23.999,28.09 ; 27.726,29.652 cw(c28.117,26.748) 31.021,27.14 ; 29.74,25.805 cw(c28.093,25.188) 28.711,23.54 ; 23.999,28.09 ccw(c24.411,28.09) 24.411,27.678 ; 23.999,28.09 ccw(c27.5,28.09) 27.5,24.589 ; 24.411,27.678 cw(c24.411,24.589) 27.5,24.589 ; 24.411,27.678 ccw(c24.411,30.767) 27.5,30.767 ; 24.411,27.678 cw(c27.912,27.678) 27.912,31.178 ccw(c27.912,30.767) 27.5,30.767 ; 27.5,24.589 ccw(c30.589,21.5) 27.5,18.411 ccw(c24.411,21.5) 27.5,24.589 ; 27.5,30.767 ccw(c30.589,30.767) 30.589,27.678 cw(c30.589,27.266) 31.001,27.266 ccw(c27.5,27.266) 27.5,30.767 ; 28.711,23.54 ccw(c28.302,25.416) 30.177,25.824 ccw(c29.965,25.596) 29.737,25.808 cw(c29.118,26.416) 28.25,26.431 cw(c29.518,26.42) 30.77,26.629 cw(c28.196,26.114) 28.711,23.54 ; 21.116,20.882 cw(c23.69,18.308) 26.264,20.882 cw(c25.75,21.191) 25.441,20.676 ccw(c23.176,18.617) 21.116,20.882 ; 21.116,21.706 cw(c23.69,19.132) 26.264,21.706 cw(c25.75,22.015) 25.441,21.5 ccw(c23.176,19.441) 21.116,21.706 ; 21.116,22.53 cw(c23.69,19.956) 26.264,22.53 cw(c25.75,22.839) 25.441,22.324 ccw(c23.176,20.264) 21.116,22.53 ; 21.322,19.853 cw(c23.896,17.279) 26.47,19.853 cw(c25.956,20.161) 25.647,19.647 ccw(c23.382,17.587) 21.322,19.853 ; 23.376,16.395 cw(c24.675,16.487) 25.78,17.177 ccw(c25.785,16.034) 24.642,16.028 ccw(c26.401,16.088) 26.46,14.329 cw(c25.951,16.905) 23.376,16.395 ; 23.381,17.381 cw(c25.853,16.352) 26.882,18.823 cw(c25.688,18.905) 25.605,17.711 ccw(c24.658,16.434) 23.381,17.381 ; 25.063,16.497 cw(c25.711,16.257) 25.951,16.905 cw(c25.767,16.271) 26.401,16.088 ccw(c25.527,15.624) 25.063,16.497 ; 28.118,18.823 ccw(c29.312,18.905) 29.395,17.711 cw(c30.342,16.434) 31.619,17.381 ccw(c29.147,16.352) 28.118,18.823 ; 28.53,19.853 ccw(c29.044,20.161) 29.353,19.647 cw(c31.618,17.587) 33.678,19.853 ccw(c31.104,17.279) 28.53,19.853 ; 28.54,14.329 ccw(c29.049,16.905) 31.624,16.395 ccw(c30.325,16.487) 29.22,17.177 cw(c29.215,16.034) 30.358,16.028 cw(c28.599,16.088) 28.54,14.329 ; 28.599,16.088 cw(c29.233,16.271) 29.049,16.905 cw(c29.289,16.257) 29.937,16.497 ccw(c29.473,15.624) 28.599,16.088 ; 28.736,20.882 ccw(c29.25,21.191) 29.559,20.676 cw(c31.824,18.617) 33.884,20.882 ccw(c31.31,18.308) 28.736,20.882 ; 28.736,21.706 ccw(c29.25,22.015) 29.559,21.5 cw(c31.824,19.441) 33.884,21.706 ccw(c31.31,19.132) 28.736,21.706 ; 28.736,22.53 ccw(c29.25,22.839) 29.559,22.324 cw(c31.824,20.264) 33.884,22.53 ccw(c31.31,19.956) 28.736,22.53
  lines w0.486: 27.335,18.617 ccw(c24.452,21.5) 27.335,24.383 ; 27.665,18.617 cw(c30.548,21.5) 27.665,24.383
  text "RADMEHR" at 31.139,12.906 h1.62
  text "MORADKHANI" at 32.423,11.791 h1.62
Top Solder:
  region: 55.7,23.46 58.3,23.46 cw(c58.3,22.56) 59.2,22.56 59.2,19.96 cw(c58.3,19.96) 58.3,19.06 55.8,19.06 cw(c55.8,20.06) 54.8,20.06 54.8,22.56 cw(c55.7,22.56)
  region: 55.7,31.08 58.3,31.08 cw(c58.3,30.18) 59.2,30.18 59.2,27.58 cw(c58.3,27.58) 58.3,26.68 55.8,26.68 cw(c55.8,27.68) 54.8,27.68 54.8,30.18 cw(c55.7,30.18)
  region: 55.7,38.7 58.3,38.7 cw(c58.3,37.8) 59.2,37.8 59.2,35.2 cw(c58.3,35.2) 58.3,34.3 55.8,34.3 cw(c55.8,35.3) 54.8,35.3 54.8,37.8 cw(c55.7,37.8)
  region: 55.7,8.22 58.3,8.22 cw(c58.3,7.32) 59.2,7.32 59.2,2.22 cw(c58.3,2.22) 58.3,1.32 55.7,1.32 cw(c55.7,2.22) 54.8,2.22 54.8,7.32 cw(c55.7,7.32)
Bottom Solder:
  region: 55.7,23.46 58.3,23.46 cw(c58.3,22.56) 59.2,22.56 59.2,19.96 cw(c58.3,19.96) 58.3,19.06 55.8,19.06 cw(c55.8,20.06) 54.8,20.06 54.8,22.56 cw(c55.7,22.56)
  region: 55.7,31.08 58.3,31.08 cw(c58.3,30.18) 59.2,30.18 59.2,27.58 cw(c58.3,27.58) 58.3,26.68 55.8,26.68 cw(c55.8,27.68) 54.8,27.68 54.8,30.18 cw(c55.7,30.18)
  region: 55.7,38.7 58.3,38.7 cw(c58.3,37.8) 59.2,37.8 59.2,35.2 cw(c58.3,35.2) 58.3,34.3 55.8,34.3 cw(c55.8,35.3) 54.8,35.3 54.8,37.8 cw(c55.7,37.8)
  region: 55.7,8.22 58.3,8.22 cw(c58.3,7.32) 59.2,7.32 59.2,2.22 cw(c58.3,2.22) 58.3,1.32 55.7,1.32 cw(c55.7,2.22) 54.8,2.22 54.8,7.32 cw(c55.7,7.32)

## Text inside footprints (layer, text, board x,y; h text height)
P1: Top Overlay "1" at 1,2 h0.6; Top Overlay "2" at 2.5,2 h0.6; Top Overlay "10" at 2.5,13 h0.6; Top Overlay "9" at 1,13 h0.6